# Altium PCB PCB1.PcbDoc
Units mm, origin at the board's own origin, x right, y up, seen from the top; angles counter-clockwise.
Board outline 36.83 x 49.02 mm, 2 copper layers (Top Layer, Bottom Layer); 23 components, 16 nets, 88 pads, 8 vias.
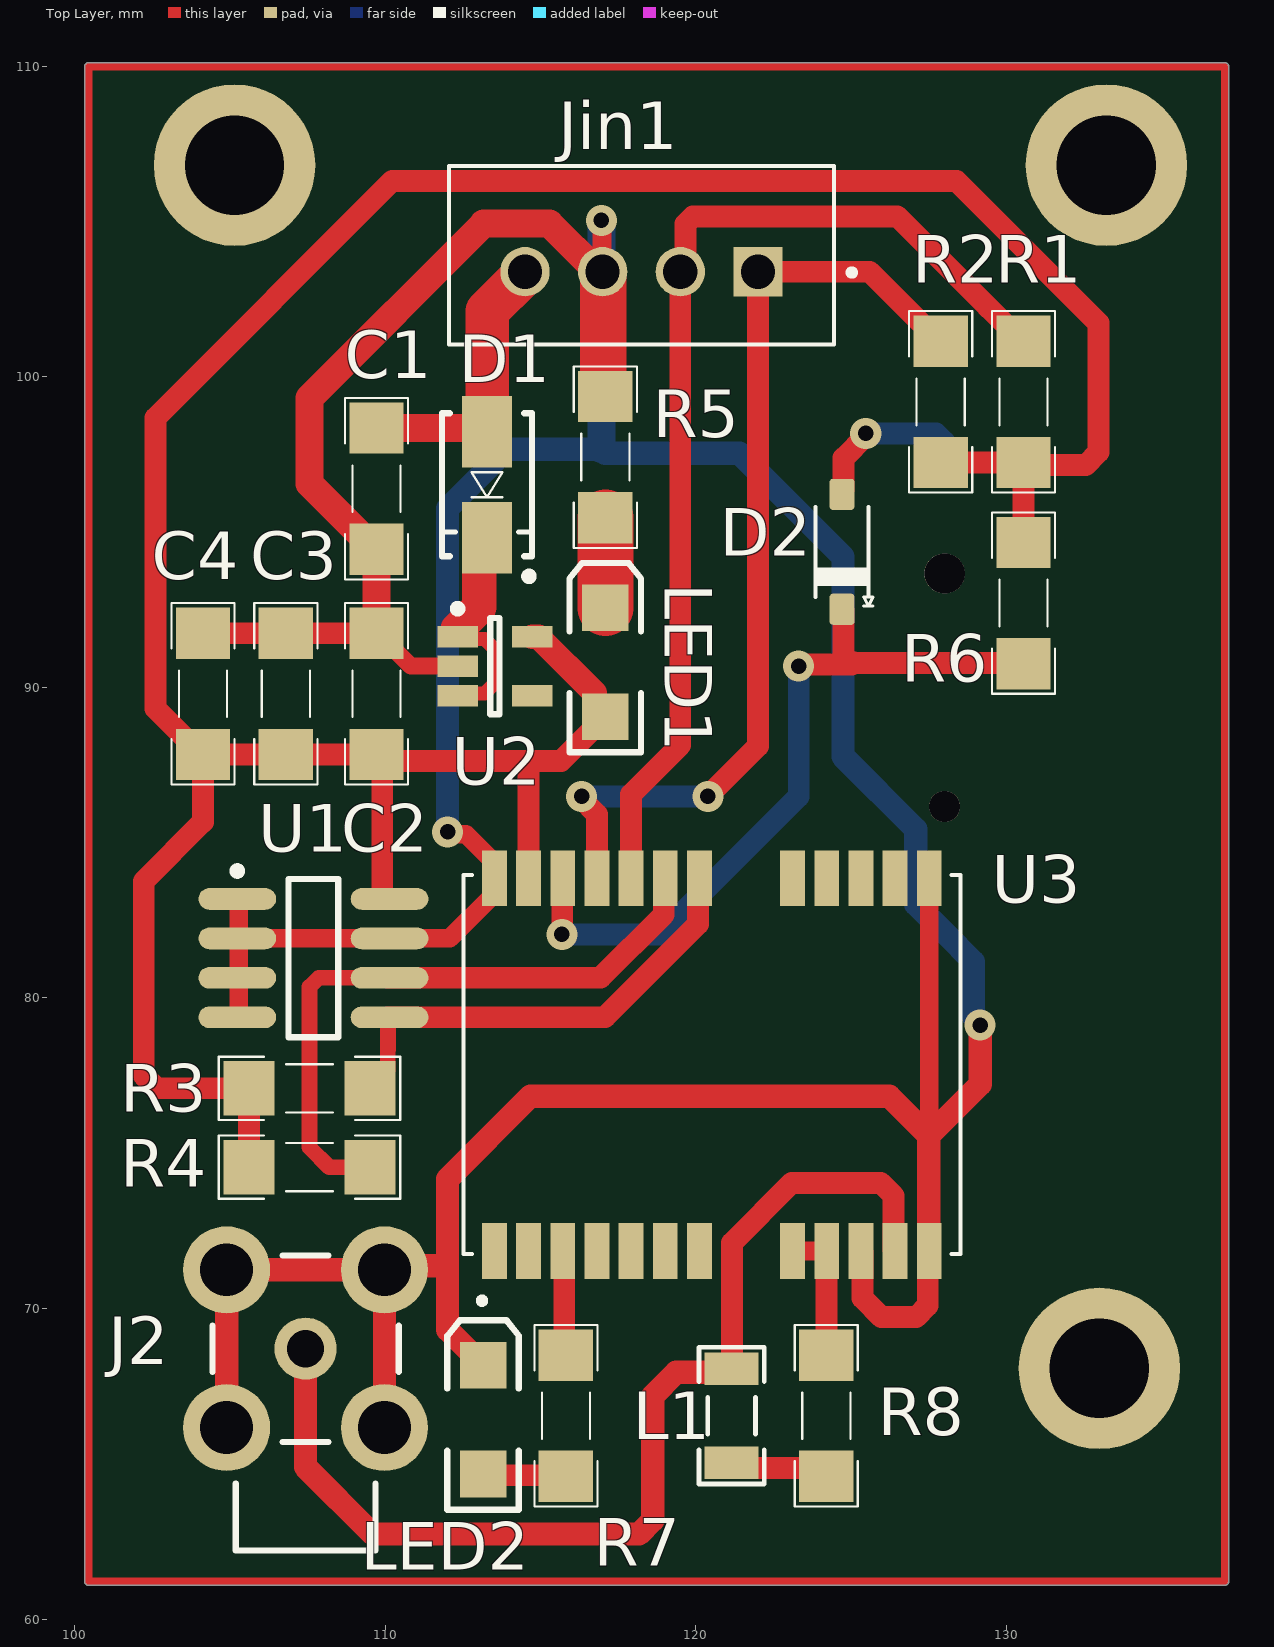
[diagram p0: Top Layer view]
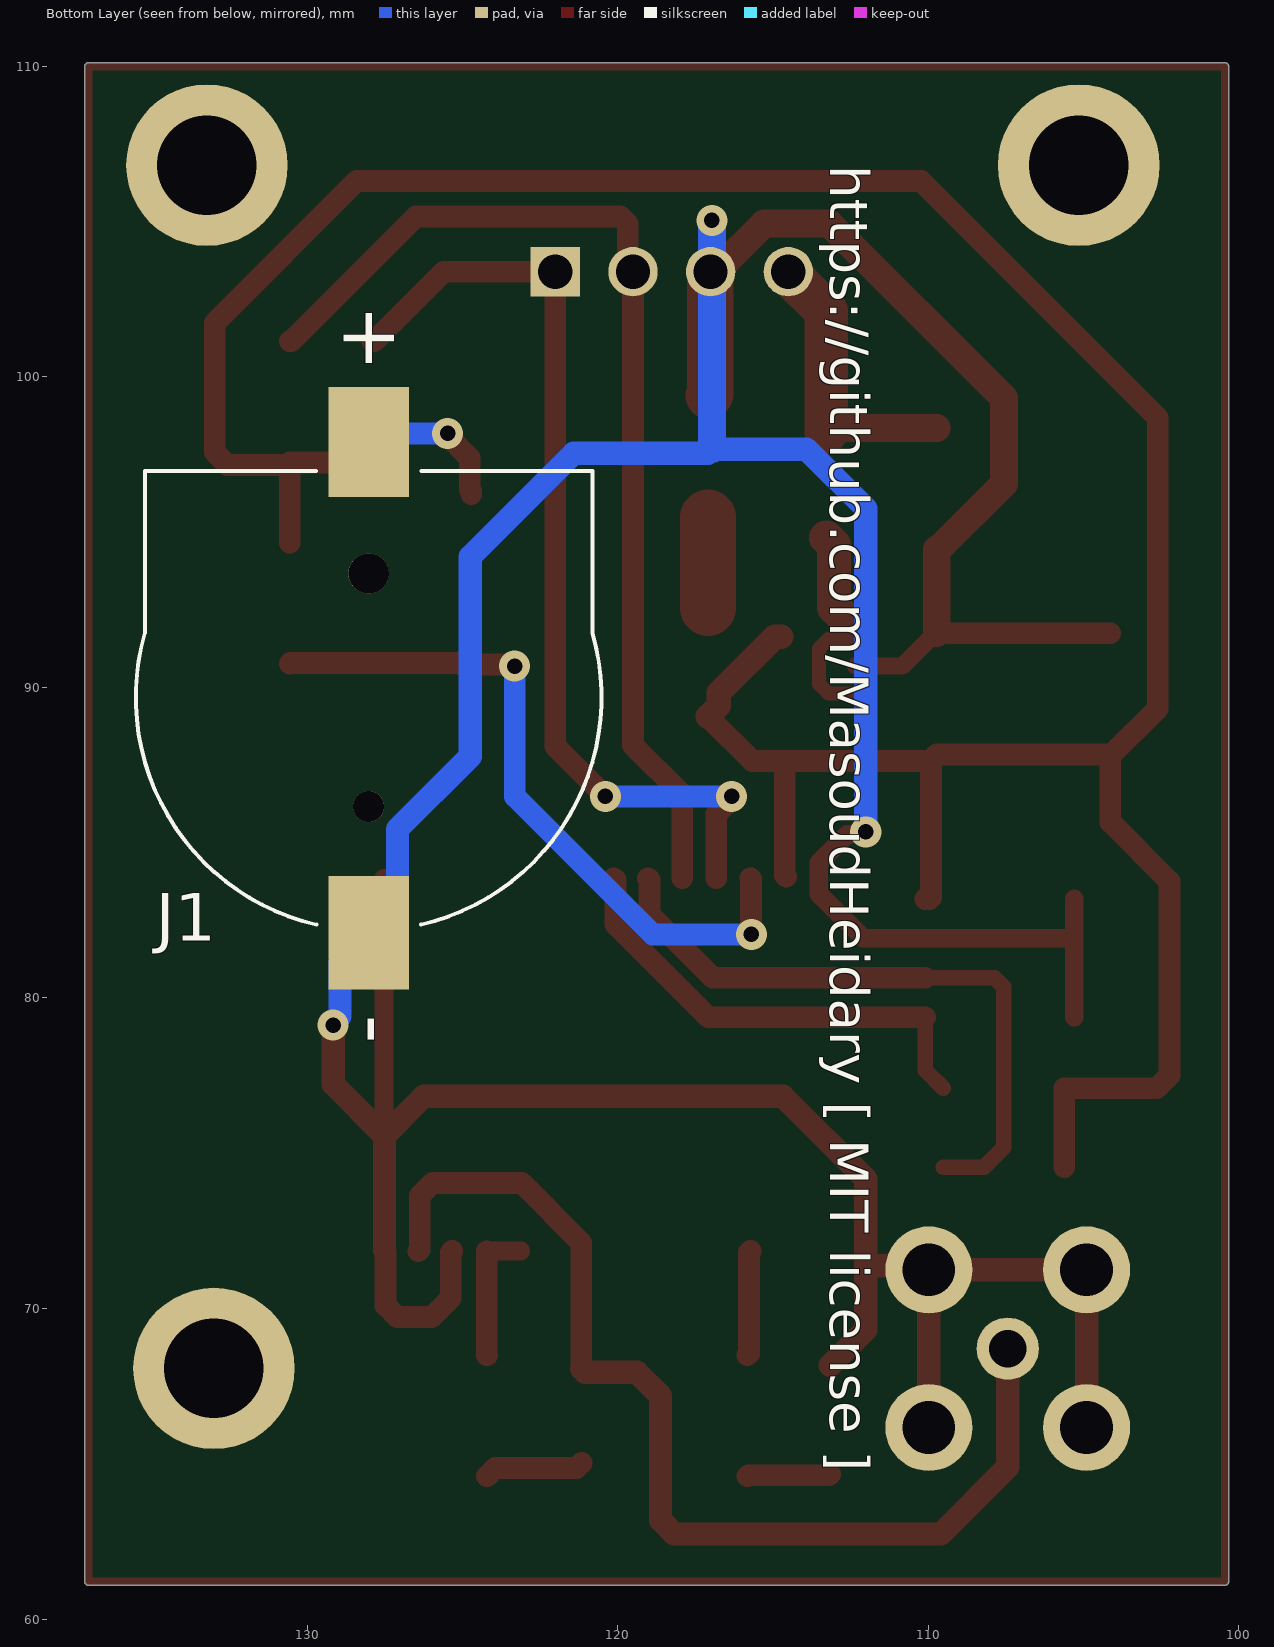
[diagram p1: Bottom Layer view, seen from below]
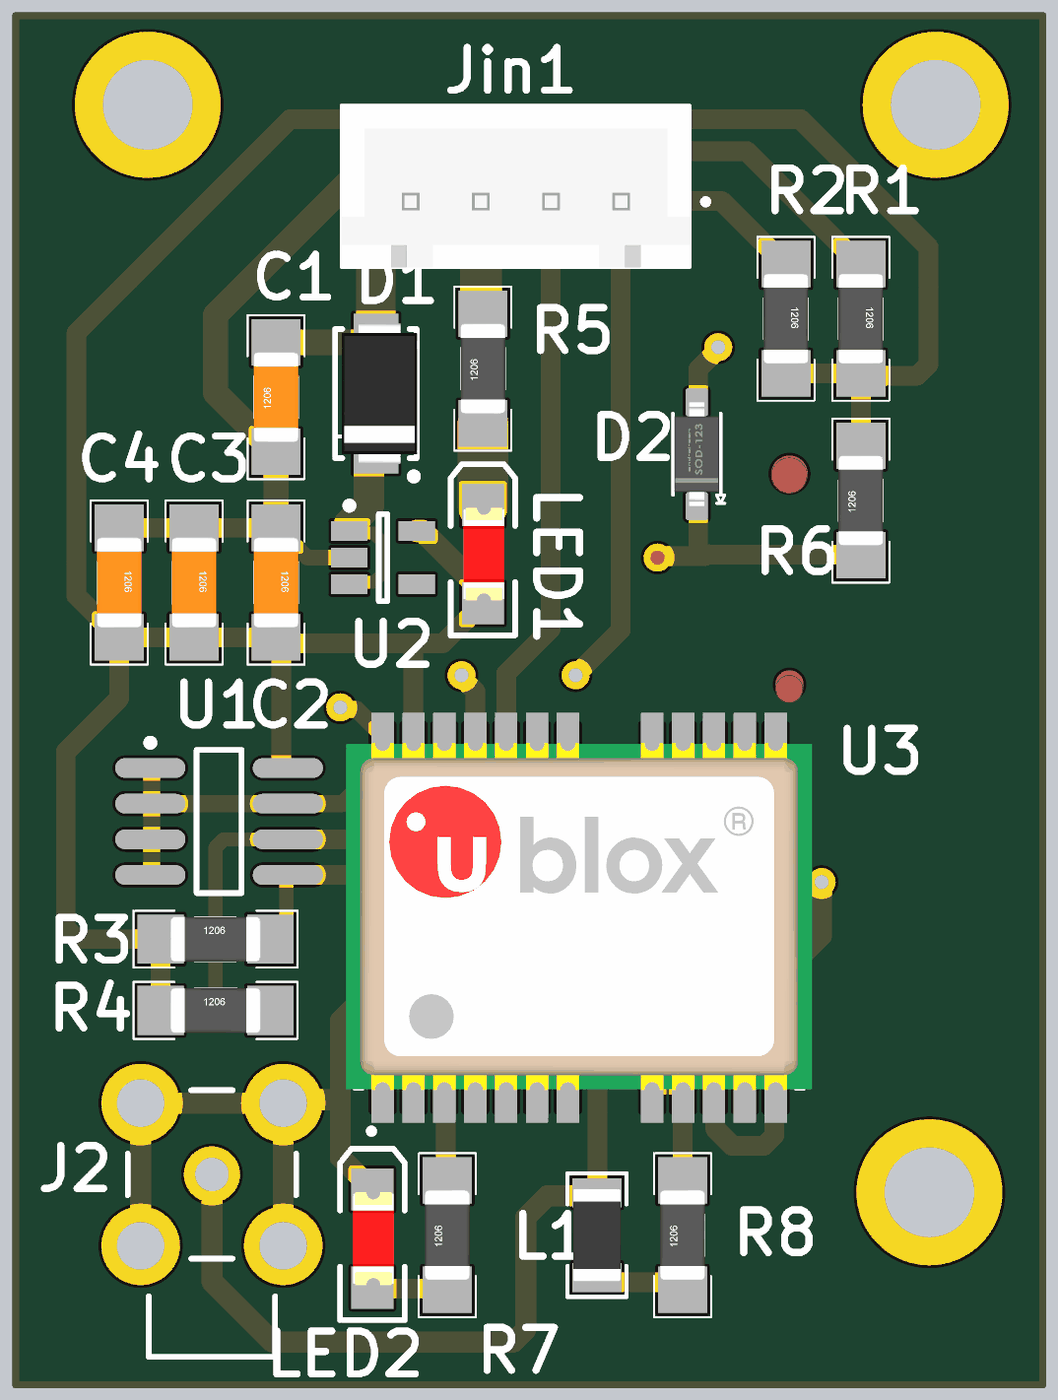
[diagram p2: 3D render of the assembled board from above, using the file's embedded part models]

## Layer stack, top to bottom
Top Solder: solder mask 0.0102, Solder Resist, Dk 3.5
Top Layer: signal copper 0.0356
Dielectric 1: dielectric 0.32, FR-4, Dk 4.8
Bottom Layer: signal copper 0.0356
Bottom Solder: solder mask 0.0102, Solder Resist, Dk 3.5

## Board outline
100.33,61.214 ccw(c100.457,61.214) 100.457,61.087 137.033,61.087 ccw(c137.033,61.214) 137.16,61.214 137.16,109.982 ccw(c137.033,109.982) 137.033,110.109 100.457,110.109 ccw(c100.457,109.982) 100.33,109.982

## Design rules (kind name [scope] priority, off if disabled: settings)
Clearance [All] p1: gap=0.3 ignorepadtopadclearanceinfootprint=TRUE except(0.7: Arc-Poly Track-Poly SMDPad-Poly THPad-Poly Via-Poly Fill-Poly Poly-Poly Poly-Region)
DiffPairsRouting [All] p1: maxlimit=0.254 minlimit=0.254 mostfreqgap=0.254 toplayer_minwidth=0.3 toplayer_maxwidth=0.5 toplayer_prefwidth=0.3 bottomlayer_minwidth=0.3 bottomlayer_maxwidth=0.5 bottomlayer_prefwidth=0.3 maxuncoupledlength=12.7
PolygonConnect [All] p1: connectstyle=Relief reliefconductorwidth=0.254 reliefentries=4 polygonreliefangle="90 Angle" airgapwidth=0.254
RoutingVias [All] p1: holewidth=0.5 width=1 viastyle="Through Hole" minholewidth=0.5 minwidth=1 maxholewidth=0.711 maxwidth=1.27
SolderMaskExpansion [All] p1: expansion=0.102
Width "Schematic Width Constraint_2" [InNet('VCC3.3')] p1: maxlimit=3 minlimit=0.5 preferedwidth=1.5 minimp=50.000000 maximp=50.000000 favimp=50.000000
Width "Schematic Width Constraint_1" [InNet('Vin')] p2: maxlimit=3 minlimit=0.5 preferedwidth=1.5 minimp=50.000000 maximp=50.000000 favimp=50.000000
Width "Schematic Width Constraint" [InNet('GND')] p3: maxlimit=3 minlimit=0.3 preferedwidth=1.5 minimp=50.000000 maximp=50.000000 favimp=50.000000
Width [All] p4: maxlimit=10 minlimit=0.254 preferedwidth=0.3 minimp=50.000000 maximp=50.000000 favimp=50.000000
29 further rules are at their usual default settings.

## Components (designator, comment, footprint, x,y, rotation, side; value= is the part's Value field where it differs from the comment)
C1 "1uF" CAPC4817X12N 109.728,96.393 r90 top
C2 "10uF" CAPC4817X12N 109.728,89.789 r270 top
C3 "0.1uF" CAPC4817X12N 106.807,89.789 r270 top
C4 "0.1uF" CAPC4817X12N 104.14,89.789 r270 top
D1 "1n4007" DIOM4629X24N 113.284,96.52 r270 top
D2 "1N4148W-TP" SOD123 124.714,94.361 r90 top
J1 "BC501SM-TR" *MPD_BC501SM-TR_BC501SM-TR(Primary) 128.016,89.662 r90 bottom
J2 "COAX-F" MCX5.08-H5 107.442,68.707 r90 top
Jin1 "B4B-XH-A(LF)(SN)" *JST_B4B-XH-A(LF)(SN) 122.007,103.378 r180 top
L1 "inductor-22uH" IND1206 121.158,66.548 r270 top
LED1 "Red" "LED SMD 1206" 117.094,90.805 r90 top
LED2 "Red" "LED SMD 1206" 113.157,66.421 r90 top
R1 "10K" RESC4817X04N 130.556,99.187 r270 top
R2 "10K" RESC4817X04N 127.889,99.187 r270 top
R3 "10K" RESC4817X04N 107.569,77.089 r0 top
R4 "10K" RESC4817X04N 107.569,74.549 r0 top
R5 "1K" RESC4817X04N 117.094,97.409 r90 top
R6 "1K" RESC4817X04N 130.556,92.71 r90 top
R7 "1K" RESC4817X04N 115.824,66.548 r90 top
R8 "22R" RESC4817X04N 124.206,66.548 r90 top
U1 "AT24C64" 8S1_M 107.696,81.28 r0 top
U2 "LN1134A332MR" MF05A_M 113.538,90.678 r0 top
U3 "NEO-6M-GPS" XCVR_NEO-6M-GPS 120.523,77.851 r90 top

## Footprints (in the part's own frame and the unit in brackets; to place one, negate y for a bottom-side part, rotate by r counter-clockwise, add the part's x,y. Pads: shape width x height; smd on the part's side, far side on the other; paste and mask are expansions set on the pad)
8S1_M [mm] "SOIC, 8-Leads, Body 4.9x3.9mm, Pitch 1.27mm, IPC Low Density"
  oval 2.5x0.7 smd: 1(-2.45,1.905) 2(-2.45,0.635) 3(-2.45,-0.635) 4(-2.45,-1.905) 5(2.45,-1.905) 6(2.45,-0.635) 7(2.45,0.635) 8(2.45,1.905)
  silkscreen extent -2.57,-2.55 0.8,2.93, body extent -1.99,-2.52 1.99,2.52, height 1.75
*JST_B4B-XH-A(LF)(SN) [mm]
  rect 1.59x1.59 hole 1.1: 1(0,0)
  round 1.59 hole 1.1: 2(2.5,0) 3(5,0) 4(7.5,0)
  silkscreen extent -3.12,-3.4 9.95,2.35, body extent -2.47,-3.38 9.93,2.37, height 7.01
*MPD_BC501SM-TR_BC501SM-TR(Primary) [mm]
  rect 3.66x2.6 smd: NEG(-7.57,0)
  round 1 hole 1 unplated: None(-3.5,0)
  round 1.3 hole 1.3 unplated: None(4,0)
  rect 3.54x2.6 smd: POS(8.23,0)
  silkscreen extent -7.3,-7.49 7.3,7.49, body extent -9.02,-7.38 9.78,7.37, height 4.25
CAPC4817X12N [mm] "Chip Capacitor, 2-Leads, Body 4/80x1/70mm, IPC Medium Density-Design:Abbas Basereh"
  rect 1.65x1.75 smd: 1(-1.95,0) 2(1.95,0)
  silkscreen extent -2.92,-1.02 2.92,1.02, body extent -1.6,-0.8 1.6,0.8, height 1
DIOM4629X24N [mm] "Molded Diode, 2-Leads, Body 4/60x2/90mm, IPC Medium Density-Design:Abbas Basereh"
  rect 2.3x1.6 smd: 1(-1.7,0) 2(1.7,0)
  silkscreen extent -2.3,-1.45 3.07,1.48, body extent -2.5,-1.22 2.5,1.48, height 2.2
IND1206 [mm] "Chip Inductor, 2-Leads, Body 3/20x1/60mm, IPC Medium Density DESIGNER:ABBAS BASEREH"
  rect 1.04x1.74 smd: 1(-1.51,0) 2(1.51,0)
  silkscreen extent -2.2,-1.05 2.2,1.05, body extent -1.65,-0.85 1.65,0.85, height 0.94
"LED SMD 1206" [mm]
  rect 1.5x1.5 smd: 1(-1.75,0) 2(1.75,0)
  silkscreen extent -2.9,-1.15 3.2,1.15, body extent -1.65,-0.76 1.65,0.69, height 1.36
MCX5.08-H5 [mm] "Connector; RF Coaxial, MCX, Thru-Hole; 5 Position; Right-Angle"
  round 2 hole 1.2: 1(0,0)
  round 2.8 hole 1.7: 2(-2.54,-2.54) 3(2.54,-2.54) 4(2.54,2.54) 5(-2.54,2.54)
  silkscreen extent -6.5,-3 3,3
MF05A_M [mm] "SOT23, 5-Leads, Body 2.9x1.6mm, Pitch 0.95mm, Lead Span 2.8mm, IPC Low Density"
  rect 1.3x0.7 smd: 1(-1.2,0.95) 2(-1.2,0) 3(-1.2,-0.95) 4(1.2,-0.95) 5(1.2,0.95)
  silkscreen extent -1.32,-1.55 0.15,1.97, body extent -0.9,-1.55 0.9,1.55, height 1.19
RESC4817X04N [mm] "Chip Resistor, 2-Leads, Body 4/80x1/70mm, IPC Medium Density-Design:Abbas Basereh"
  rect 1.65x1.75 smd: 1(-1.95,0) 2(1.95,0)
  silkscreen extent -2.92,-1.02 2.92,1.02, body extent -1.6,-0.8 1.6,0.8, height 1
SOD123 [mm] "SOD-123; 2 Leads; Body 2.7 x 1.6 mm, (LxW)"
  round 0.508 on Mech15: 0(0,0)
  rrect25% 1x0.8 smd: 1(1.85,0) 2(-1.85,0)
  silkscreen extent -1.75,-1 1.45,0.85, body extent -1.85,-0.8 1.85,0.8, height 1.25
XCVR_NEO-6M-GPS [mm]
  rect 1.8x0.8 smd paste-2: 1(-6,7) 2(-6,5.9) 3(-6,4.8) 4(-6,3.7) 5(-6,2.6) 6(-6,1.5) 7(-6,0.4) 8(-6,-2.6) 9(-6,-3.7) 10(-6,-4.8) 11(-6,-5.9) 12(-6,-7) 13(6,-7) 14(6,-5.9) 15(6,-4.8) 16(6,-3.7) 17(6,-2.6) 18(6,0.4) 19(6,1.5) 20(6,2.6) 21(6,3.7) 22(6,4.8) 23(6,5.9) 24(6,7)
  silkscreen extent -7.7,-8 6.1,8, body extent -6.14,-8.3 6.22,8.3, height 2.64

## Part data
C1 C2 C3 C4: library part "CAP SMD 1206", "CAP 1206", Data=16-12-2016, Desc.="CAP SMD 1206", Designer="Abbas Basereh"
D1: library part "1n4007 SMD M7", "Standard Rectifiers", Manufacturer="DC COMPONENTS", Data=16-12-2016, Designer="Abbas Basereh", Link=http://www.tme.eu/en/details/m7/smd-universal-diodes/dc-components/, Part. No=M7
D2: "DIODE GEN PURP 100V 150MA SOD123", ComponentLink1Description="Manufacturer Link", ComponentLink1URL=http://www.digikey.com/product-detail/en/micro-commercial-co/1N4148W-TP/1N4148WTPMSCT-ND/717311, ComponentLink2Description=Datasheet, PackageDescription="Diode Standard 100V 150mA Surface Mount SOD-123", PackageReference=SOD-123, PackageVersion=2017-1-12, PART.NO=1N4148W-TP, Published=2017-1-12, Publisher="Abbas Basereh"
J2: "RF Coaxial PCB Connector, MCX; Thru-Hole, Right-Angle Mount Socket, Blunt Post Terminal, 50 Ohm Impedance", PackageDocument=04-Jul-1999, ComponentLink1Description="Manufacturer Link", ComponentLink1URL=http://www.amphenolrf.com/, DatasheetDocument=30-May-2003, DrillSize="Corresponds to nominal value.", LatestRevisionDate=15-Jul-2004, LatestRevisionNote="Component Replaced.", PackageReference=919-119J-51AX, PCB_Layout="Complies with manufacturer's recommendation.", Published=15-Jul-2004, Publisher="Altium Limited"
Jin1: "XH Series 4 Position 2.5 mm Pitch Through Hole Crimp Top Entry Shrouded Header", Package=None, Availability=Unavailable, MF="JST Sales", MP=B4B-XH-A_LF__SN_, Price=None, SnapEDA_Link=https://www.snapeda.com/parts/B4B-XH-A%28LF%29%28SN%29/JST%20Sales%20America%20Inc./view-part/?ref=snap
L1: library part "INDUCTOR SMD PACKAGE", "TOTAL INDUCTOR SMD PACK", Data=2017-3-10, Desc.="INDUCTOR  SMD TOTAL PACKAGES", Designer="Abbas Basereh"
LED1 LED2: library part LED, "LED", Adding Date=1387/12/22, Color=Red, Designer="Saeid Jorablo", Organazation=ControTec, Size="SMD 1206"
R1 R2 R3 R4 R5 R6 R7 R8: library part "RES 1206 0.25W", "RES 1206", Data=16-12-2016, Desc.="RES SMD 1206", Designer="Abbas Basereh"
U1: library part AT24C01BN-SP25-B, "1Kbit (128 x 8), 2-wire Bus Automotive Serial EEPROM with Write Protect, 2.5V, 8-Pin SOIC, Bulk", Code_IPC=SOIC127P600-8, Code_JEDEC=MS-012-AA, ComponentLink1Description="Manufacturer URL", ComponentLink1URL=http://www.atmel.com/, ComponentLink2Description=Datasheet, ComponentLink2URL=http://www.atmel.com/dyn/resources/prod_documents/doc8517.pdf, DatasheetVersion="8517C,  Jan-2009", PackageDescription="8-Lead (0.150\" Wide Body), Plastic Gull Wing Small Outline (JEDEC SOIC)", PackageReference=8S1, PackageVersion="revC, Mar-2005"
U2: library part LP5951MF-1.3, "Micropower, 150mA Low-Dropout CMOS Voltage Regulator, 5-pin SOT-23", Manufacturer="National Semiconductor", PackageTopMarking=LKRB*XTT, PowerWise=N, Supplier Part Number 1=1312651, ComponentLink1Description="LP5951 Datasheet", ComponentLink1URL=http://www.national.com/ds/LP/LP5951.pdf, ComponentLink2Description="LP5951 Web Page", ComponentLink2URL=http://www.national.com/pf/LP/LP5951.html, ComponentLink3Description="MF05A Package Page", ComponentLink3URL=http://www.national.com/packaging/folders/mf05a.html, CompType="LDO IC", DatasheetVersion=May-2007, PackageDescription="Molded SOT-23, .115 x .063 x .040 in Body, 5 Lead, .0375 in Pitch", PackageReference=MF05A, PackageVersion="revD, Aug-2008", PartNumber=LP5951MF-1.3, PinCount=5, Published=4-Dec-2008, Publisher="Altium Limited", RoHS=N, Supplier 1=Farnell
U3: "SMD GPS Module;", Package=None, Availability=Unavailable, MF=u-blox, MP=NEO-6M-GPS, Price=None, SnapEDA_Link=https://www.snapeda.com/parts/NEO-6M-GPS/u-blox/view-part/105879/?ref=snap
J1: SnapEDA_Link=https://www.snapeda.com/parts/BC501SM-TR/MPD%20%28Memory%20Protection%20Devices%29/view-part/479427/?ref=snap

## Free pads (board coordinates)
  round 5.2 hole 3.2: 1(133,68.072) 2(105.156,106.807) 2(133.223,106.807)

## Via types
v1: diameter 1, hole 0.5, Top Layer to Bottom Layer, 8 vias

## Nets (pads, with @x,y where several pads share a name; then routed paths per layer and width w, separated by ;. In a path a pad name is that pad's centre, name@x,y a point inside that pad or via, vN(x,y) a via of type N, cw(c..) or ccw(c..) an arc to the next point about the centre after c; other vN are vias at no path point)
GND: C1.1 C2.1 C3.1 C4.1 J1.NEG J2.2 J2.3 J2.4 J2.5 Jin1.3 LED2.2 R5.2 U1.1 U1.2 U1.3 U1.4 U1.7 U2.2 U3.10 U3.12 U3.13 U3.24 | length 163.3
  Top Layer w0.55: C2.1 109.778,91.739 110.839,90.678 U2.2
  Top Layer w0.6: U1.4@105.296,79.375 U1.2@105.296,81.915 ; U1.1@105.296,83.185 U1.2@105.296,81.915 ; v1(112.014,85.344) 112.091,85.267 112.607,85.267 113.523,84.351 U3.24 113.523,83.351 112.087,81.915 U1.7 U1.2@105.296,81.915 ; v1(116.967,105.029) 116.987,105.009 116.987,103.398 Jin1.3 ; R5.2@117.07,99.382 R5.2 ; 127.523,75.58 U3.13
  Top Layer w0.7: C4.1 C3.1 C2.1 ; U3.10 125.373,71.801 125.373,70.334 125.984,69.723 127.098,69.723 127.473,70.098 127.473,71.831 U3.12@127.508,71.866
  Top Layer w0.75: J2.5 J2.4 J2.3 ; J2.2 J2.3 ; LED2.2 112.014,69.314 112.014,71.374 ; U3.12@127.508,71.866 127.508,75.565 ; v1(129.159,79.121) 129.159,77.216 127.523,75.58 127.508,75.565 ; J2.3 110.109,71.374 112.014,71.374 ; 112.014,71.374 112.014,74.168 114.681,76.835 126.238,76.835 127.508,75.565
  Top Layer w0.9: C2.1 C1.1 109.678,94.443 107.569,96.552 107.569,99.314 113.178,104.923 115.295,104.923 116.82,103.398 Jin1.3@116.987,103.398 ; R5.2@117.044,99.359 R5.2
  Top Layer w1.5: Jin1.3 117.024,103.361 117.024,99.429 R5.2@117.07,99.382
  Bottom Layer w0.75: v1(112.014,85.344) 112.014,95.758 113.919,97.663 116.967,97.663 ; 117.094,97.536 121.412,97.536 124.746,94.202 124.746,87.77 127.091,85.425 127.091,83.017 J1.NEG 128.941,81.167 128.941,79.407 129.159,79.189 v1(129.159,79.121)
  Bottom Layer w0.9: 116.967,97.663 116.967,103.378 v1(116.967,105.029)
NetD1_2: D1.2 U2.1 U2.3 | length 7.2
  Top Layer w0.45: U2.3 112.413,89.803 113.205,89.803 113.513,90.111 113.513,91.245 113.205,91.553 112.663,91.553 U2.1@112.338,91.878
  Top Layer w1.1: U2.1@112.338,91.878 113.034,92.574 113.034,94.57 D1.2
NetD2_1: D2.1 J1.POS | length 4.9
  Top Layer w0.7: D2.1 124.714,96.311 124.764,96.361 124.764,97.378 125.476,98.09 v1(125.476,98.171)
  Bottom Layer w0.7: v1(125.476,98.171) 127.737,98.171 J1.POS
NetD2_2: D2.2 R6.1 U3.22 | length 24.7
  Top Layer w0.7: v1(115.697,82.042) 115.71,82.055 115.71,83.838 U3.22 ; v1(123.317,90.678) 123.374,90.735 125.024,90.735 ; D2.2 124.764,92.461 124.764,90.996 125.024,90.735 ; R6.1 130.533,90.783 125.118,90.783 125.095,90.806 125.024,90.735
  Bottom Layer w0.7: v1(115.697,82.042) 118.872,82.042 123.317,86.487 v1(123.317,90.678)
NetL1_2: L1.2 R8.1 | length 3.2
  Top Layer w0.7: L1.2 121.328,64.868 123.936,64.868 R8.1
NetLED1_2: LED1.2 R5.1 | length 2.9
  Top Layer w1.8: LED1.2 R5.1
NetLED2_1: LED2.1 R7.1 | length 2.7
  Top Layer w0.7: LED2.1 113.193,64.635 115.787,64.635 R7.1
Pin8: R8.2 U3.8 U3.9 | length 4.4
  Top Layer w0.6: U3.8 124.206,71.851 U3.9@124.214,71.842
  Top Layer w0.7: R8.2 124.214,68.506 U3.9@124.214,71.842
RF_IN: J2.1 L1.1 U3.11 | length 35
  Top Layer w0.7: L1.1 121.173,68.073 121.173,72.12 123.094,74.041 125.955,74.041 126.373,73.623 126.373,71.901 U3.11
  Top Layer w0.75: J2.1 107.442,64.897 109.601,62.738 118.179,62.738 118.618,63.177 118.618,67.183 119.38,67.945 121.045,67.945 L1.1
RX: Jin1.1 R2.1 U3.21 | length 31.3
  Top Layer w0.7: v1(116.332,86.487) 116.332,86.406 116.823,85.915 U3.21 ; v1(120.396,86.487) 122.007,88.098 Jin1.1 125.598,103.378 127.839,101.137 R2.1
  Bottom Layer w0.7: v1(116.332,86.487) v1(120.396,86.487)
SCL: R4.2 U1.6 U3.19 | length 20.9
  Top Layer w0.5: R4.2 108.204,74.549 107.569,75.184 107.569,80.352 107.862,80.645 U1.6@110.096,80.645
  Top Layer w0.7: U1.6@110.096,80.645 116.936,80.645 118.973,82.682 118.973,83.801 U3.19
SDA: R3.2 U1.5 U3.18 | length 15.2
  Top Layer w0.5: R3.2 110.094,77.664 110.094,78.323 110.096,78.325 U1.5@110.096,79.375
  Top Layer w0.7: U1.5@110.096,79.375 117.08,79.375 120.073,82.368 120.073,83.801 U3.18
TimePulse: R7.2 U3.3 | length 3.4
  Top Layer w0.7: U3.3 115.773,71.801 115.773,68.549 R7.2
TX: Jin1.2 R1.1 U3.20 | length 34.4
  Top Layer w0.7: U3.20 117.923,86.554 119.507,88.138 Jin1.2 119.677,103.548 119.677,104.916 119.917,105.156 126.489,105.156 129.414,102.231 129.414,102.229 130.506,101.137 R1.1
VCC3.3: C2.2 C3.2 C4.2 LED1.1 R1.2 R2.2 R3.1 R4.1 R6.2 U1.8 U2.5 U3.23 | length 101.9
  Top Layer w0.7: R4.1 R3.1 102.645,77.089 102.235,77.499 102.235,83.759 104.14,85.664 C4.2 ; U1.8@110.096,83.185 109.962,83.185 109.912,83.235 C2.2@109.912,87.655 ; U3.23@114.573,83.901 114.619,83.947 114.619,87.63 ; 114.615,87.634 114.619,87.63 ; LED1.1 115.669,87.63 114.619,87.63 ; R2.2@127.953,97.174 R2.2 R1.2 ; R6.2 R1.2 ; C4.2 104.09,87.839 102.615,89.314 102.615,98.678 110.236,106.299 128.397,106.299 132.969,101.727 132.969,97.565 132.559,97.155 130.638,97.155 R1.2 ; C4.2 C3.2 C2.2 C2.2@109.912,87.655 ; C2.2@109.912,87.655 109.937,87.63 114.619,87.63
  Top Layer w0.8: U2.5 114.938,91.628 116.744,89.822 116.744,89.405 LED1.1
Vin: C1.2 D1.1 Jin1.4 | length 9.3
  Top Layer w0.7: C1.2 C1.2@109.751,98.32 ; D1.1@113.161,98.343 D1.1
  Top Layer w0.9: C1.2 D1.1@113.161,98.343
  Top Layer w1.4: D1.1 113.284,102.104 114.507,103.327 Jin1.4
pads on no net: D2.0 J1.None U2.4 U3.1 U3.2 U3.4 U3.5 U3.6 U3.7 U3.14 U3.15 U3.16 U3.17
copper on no net: | length 170.7
  Top Layer w0.254: 100.457,61.214 100.457,109.982 137.033,109.982 137.033,61.214 100.457,61.214

## Silkscreen, mask and mechanical layers (free items; w line width, h text height)
Bottom Overlay:
  text "https://github.com/MasoudHeidary [ MIT license ]" at 113.157,106.807 h1.25 r90

## Text inside footprints (layer, text, board x,y; h text height)
J1: Bottom Overlay "-" at 127.246,78.522 h1.88 r270; Bottom Overlay "+" at 127.196,100.152 h1.88 r270